# Altium PCB lps_display_rev_10.PcbDoc (part 1 of 3)
Units mil, origin at the board's own origin, x right, y up, seen from the top; angles counter-clockwise.
Board outline 5360 x 2470 mil, 2 copper layers (Top Layer, Bottom Layer), stack 6.2 mil thick; 137 components, 84 nets, 474 pads, 135 vias.
Unrouted connection lines stored in the file: 10.
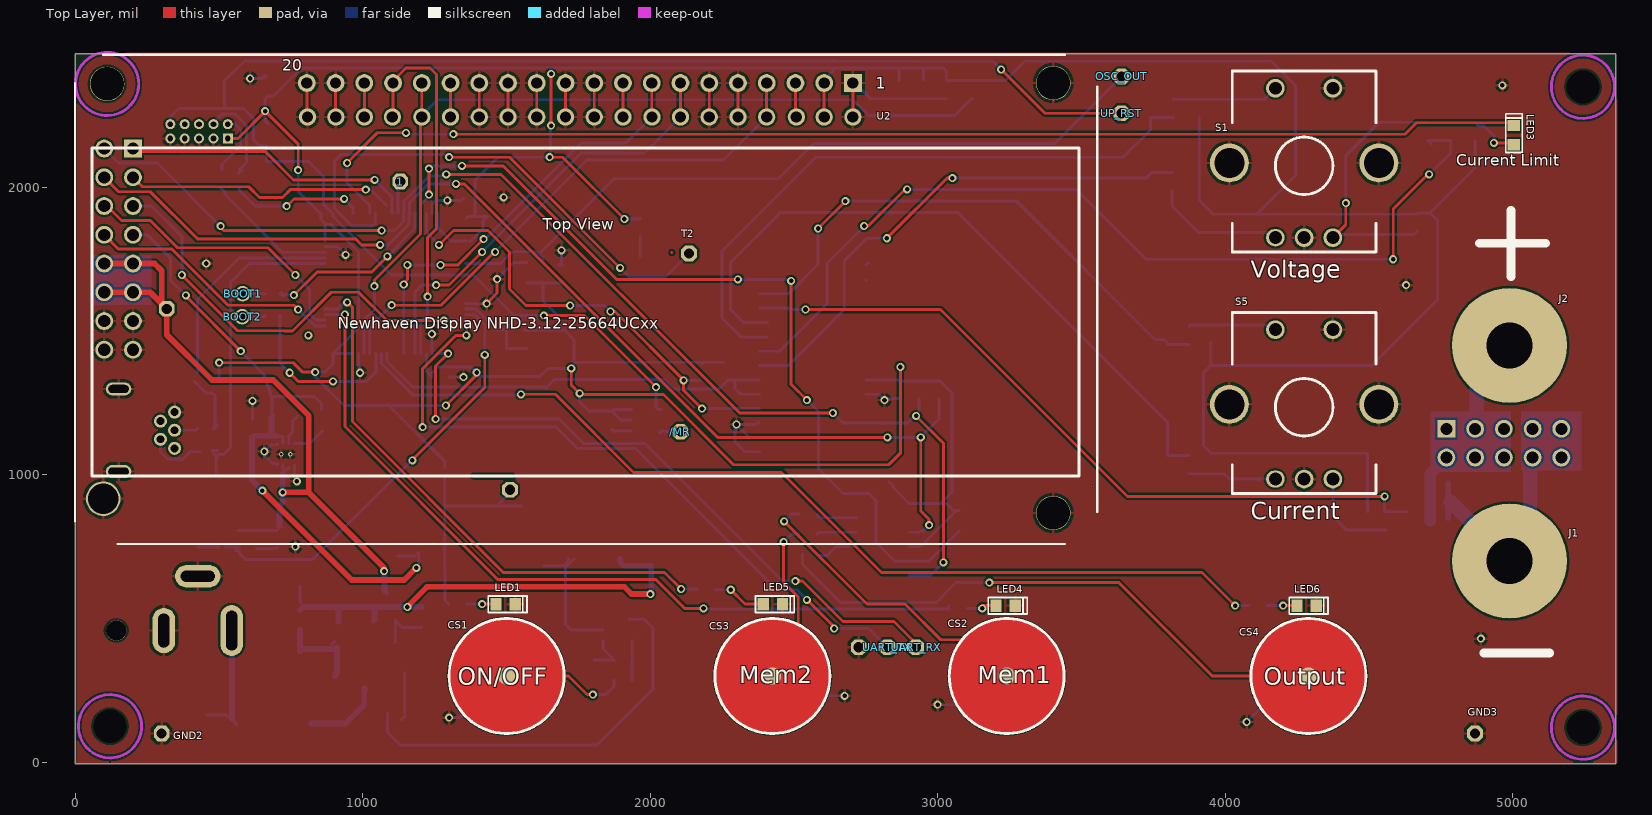
[diagram p0: Top Layer view]
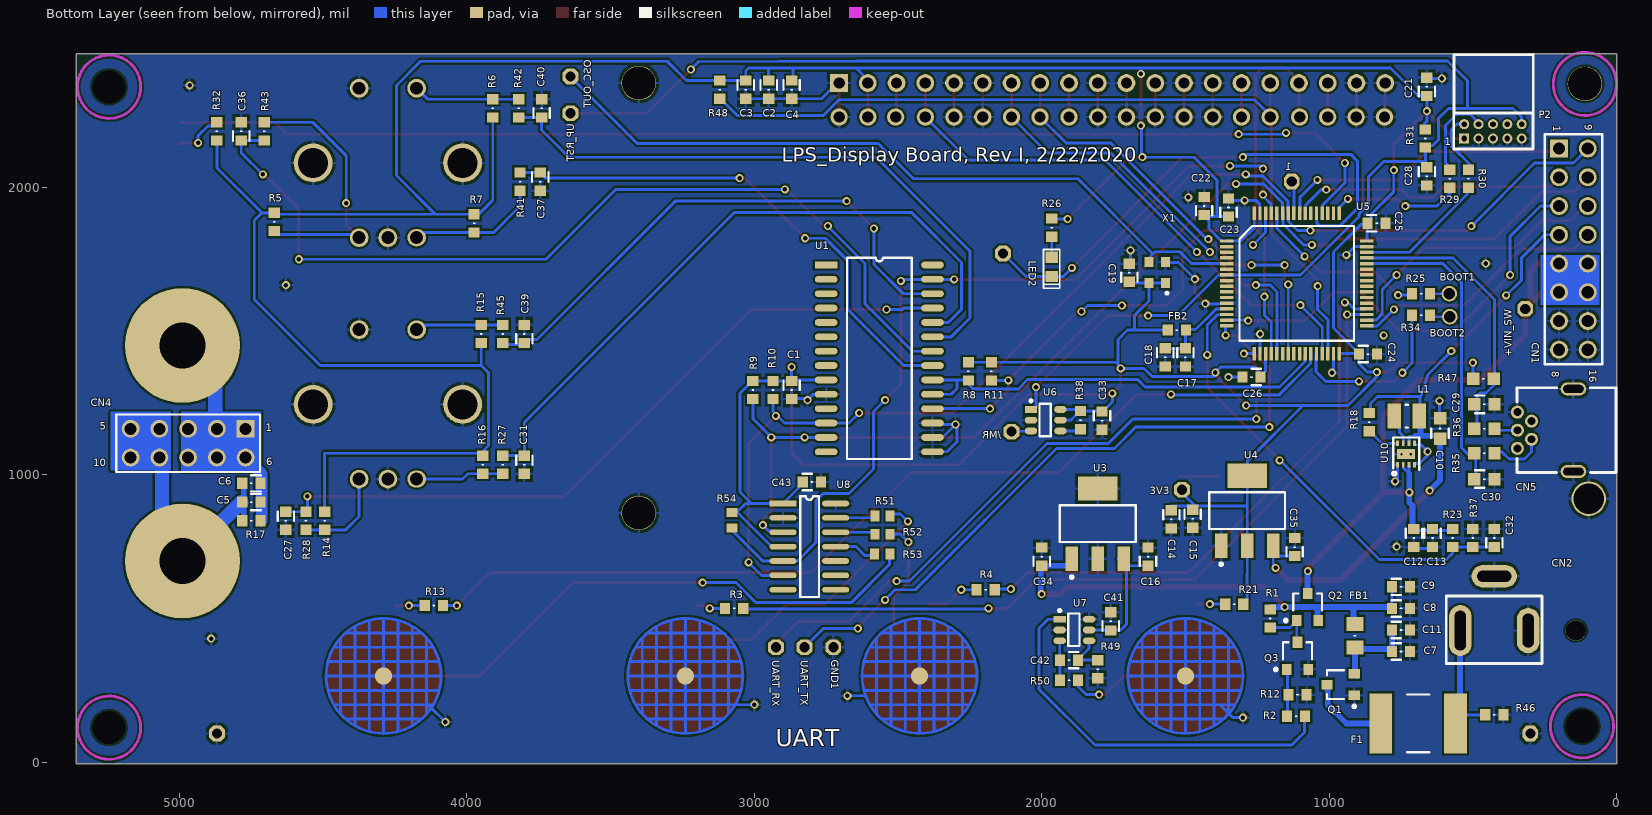
[diagram p1: Bottom Layer view, seen from below]
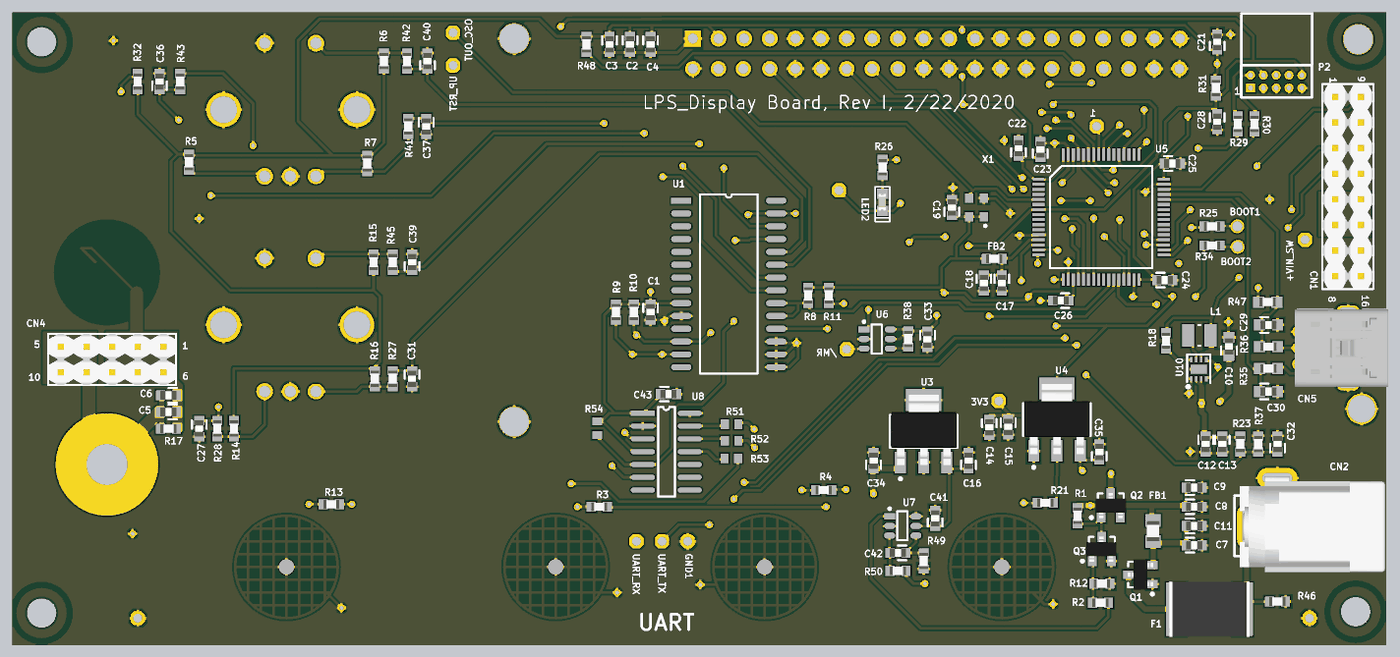
[diagram p3: 3D render of the assembled board from below, using the file's embedded part models]

## Layer stack, top to bottom
Top Solder: solder mask 0.4, Solder Resist, Dk 3.5
Top Layer: signal copper 0.6
Dielectric 2: prepreg 5, Dk 4.2
Bottom Layer: signal copper 0.6
Bottom Solder: solder mask 0.4, Solder Resist, Dk 3.5

## Board outline
0,-5 5360,-5 5360,2465 0,2465

## Design rules (kind name [scope] priority, off if disabled: settings)
Clearance [All] p1: gap=7 ignorepadtopadclearanceinfootprint=FALSE except(0: Arc-Hole Track-Hole SMDPad-Hole THPad-Hole Via-Hole Fill-Hole Poly-Hole Region-Hole Text-Hole)
ComponentClearance [All] p1 off: gap=10 collisioncheckmode=3 verticalgap=10 showdistances=FALSE
HoleSize [All] p1: absolutevalues=TRUE maxlimit=200 minlimit=1 maxpercent=80.000 minpercent=20.000
MinimumSolderMaskSliver [All] p1: minsoldermaskwidth=5
PolygonConnect [All] p1: connectstyle=Relief reliefconductorwidth=10 reliefentries=4 polygonreliefangle="90 Angle" airgapwidth=10
RoutingVias [All] p1: holewidth=28 width=50 viastyle="Through Hole" minholewidth=28 minwidth=50 maxholewidth=28 maxwidth=50
SilkToSolderMaskClearance [IsPad] p1: minsilkscreentomaskgap=1 clearancetoexposedcopper=TRUE
SolderMaskExpansion [All] p1: expansion=4
Width [All] p1: maxlimit=200 minlimit=7 preferedwidth=10 minimp=50.000000 maximp=50.000000 favimp=50.000000
26 further rules are at their usual default settings.

## Classes and differential pairs
component class lps_display_rev_10_p2: 1 /MR BOOT1 BOOT2 C17 C18 C19 C21 C22 C23 C24 C25 C26 C28 C29 C30 C33 C43 CN5 CS2 CS3 CS4 FB2 LED2 LED3 LED4 LED5 LED6 OSC_OUT P2 R3 R4 R13 R25 R26 R29 R30 R31 R32 R34 R35 R36 R38 R47 R51 R52 R53 R54 T2 U5 U6 U8 UART_RX UART_TX UP_RST X1
component class lps_display_rev_10_p1: 3V3 +VIN_SW C1 C2 C3 C4 C5 C6 C7 C8 C9 C10 C11 C12 C13 C14 C15 C16 C27 C31 C32 C34 C35 C36 C37 C39 C40 C41 C42 CN1 CN2 CN4 CN? CS1 F1 FB1 GND1 GND2 GND3 J1 J2 L1 LED1 LED? Q1 Q2 Q3 R1 R2 R5 R6 R7 R8 R9 R10 R11 R12 R14 R15 R16 R17 R18 R21 R23 R27 R28 R37 R41 R42 R43 R45 R46 R48 R49 R50 R? S1 S5 U1 U2 U3 U4 U7 U10 U?

## Components (designator, comment, footprint, x,y, rotation, side; value= is the part's Value field where it differs from the comment)
1 "" "TestPoint-TH 35 mil"#1 1130,2020 r90 top
3V3 "" "TestPoint-TH 35 mil"#2 1467,963 r90 bottom
+VIN_SW "" "TestPoint-TH 35 mil"#3 267.5,1577.5 r180 bottom
/MR "" "TestPoint-TH 35 mil"#1 2105,1150 r90 top
BOOT1 "TP" "TestPoint-TH 40 mil" 581.5,1630 r90 top
BOOT2 "TP" "TestPoint-TH 40 mil" 580,1550 r90 top
C1 "0.1uF 0603 50V" CAPC0603(1608)_N 2870,1295 r270 bottom
C2 "10uF" CAPC0603(1608)_N 2950,2340 r270 bottom
C3 "10uF" CAPC0603(1608)_N 3030,2340 r270 bottom
C4 "0.1uF 0603 50V" CAPC0603(1608)_N 2870,2340 r270 bottom
C5 "10uF" CAPC0603(1608)_N 4750,905 r0 bottom
C6 "0.1uF 0603 50V" CAPC0603(1608)_N 4750,970 r0 bottom
C7 "10uF" CAPC0603(1608)_N 750,385 r180 bottom
C8 "0.1uF 0603 50V" CAPC0603(1608)_N 750,535 r180 bottom
C9 "10uF" CAPC0603(1608)_N 750,610 r180 bottom
C10 "22uF" CAPC0603(1608)_M 614,1161 r90 bottom
C11 "0.1uF 0603 50V" CAPC0603(1608)_N 750,460 r180 bottom
C12 "10uF" CAPC0603(1608)_N 705,780 r270 bottom
C13 "0.1uF 0603 50V" CAPC0603(1608)_N 640,780 r270 bottom
C14 "10uF" CAPC0603(1608)_N 1549,845 r270 bottom
C15 "0.1uF 0603 50V" CAPC0603(1608)_N 1475,847 r270 bottom
C16 "10uF" CAPC0603(1608)_N 1630,715 r90 bottom
C17 "10uF" CAPC0603(1608)_N 1500,1408.5 r270 bottom
C18 "0.1uF 0603 50V" CAPC0603(1608)_N 1570,1408.5 r270 bottom
C19 "0.1uF 0603 50V" CAPC0603(1608)_N 1695,1703 r90 bottom
C21 "0.1uF 0603 50V" CAPC0603(1608)_N 660,2350 r90 bottom
C22 "10uF" CAPC0603(1608)_N 1435,1935 r90 bottom
C23 "0.1uF 0603 50V" CAPC0603(1608)_N 1350,1930 r90 bottom
C24 "0.1uF 0603 50V" CAPC0603(1608)_N 865,1420 r180 bottom
C25 "0.1uF 0603 50V" CAPC0603(1608)_N 835,1875 r180 bottom
C26 "0.1uF 0603 50V" CAPC0603(1608)_N 1270,1340 r0 bottom
C27 "0.1uF 0603 50V" CAPC0603(1608)_N 4630,840 r270 bottom
C28 "1uF" CAPC0603(1608)_N 660,2038.5 r270 bottom
C29 "33pF" CAPC0603(1608)_M 460,1245 r180 bottom
C30 "33pF" CAPC0603(1608)_M 460,985 r180 bottom
C31 "0.1uF 0603 50V" CAPC0603(1608)_N 3800,1035 r270 bottom
C32 "0.1uF 0603 50V" CAPC0603(1608)_N 425,780 r90 bottom
C33 "0.1uF 0603 50V" CAPC0603(1608)_N 1790,1188.5 r270 bottom
C34 "0.1uF 0603 50V" CAPC0603(1608)_N 2000,715 r90 bottom
C35 "0.1uF 0603 50V" CAPC0603(1608)_N 1120,748.5 r90 bottom
C36 "0.1uF 0603 50V" CAPC0603(1608)_N 4785,2195 r90 bottom
C37 "0.1uF 0603 50V" CAPC0603(1608)_N 3745,2020 r270 bottom
C39 "0.1uF 0603 50V" CAPC0603(1608)_N 3800,1490 r90 bottom
C40 "0.1uF 0603 50V" CAPC0603(1608)_N 3740,2275 r90 bottom
C41 "0.1uF 0603 50V" CAPC0603(1608)_N 1760,490 r90 bottom
C42 "0.1uF 0603 50V" CAPC0603(1608)_N 1905,355 r0 bottom
C43 "0.1uF 0603 50V" CAPC0603(1608)_N 2800,975 r180 bottom
CN1 "Header 8X2A" HDR2X8_CEN 200,2135 r270 bottom
CN2 "PJ-050AH" PJ-050AH 543.57,458 r270 bottom
CN4 "Header 5X2A" HDR2X5_CEN 4770,1160 r0 bottom locked
CN5 "Mini-USB RA Type B" "USB-MINI-B - 2A" 150,1155 r180 bottom
CS1 "Cap_Sense_Pad" CAP_TOUCH_ROUND#1 1500,300 r0 top locked
CS2 "Cap_Sense_Pad" CAP_TOUCH_ROUND#2 3240,300 r0 top locked
CS3 "Cap_Sense_Pad" CAP_TOUCH_ROUND#3 2425,300 r0 top locked
CS4 "Cap_Sense_Pad" CAP_TOUCH_ROUND#4 4290,300 r0 top locked
F1 "2920L500/16MR" "2920 Fuse" 690,135 r0 bottom
FB1 "300 Ohm @ 100MHz, 0806" RESC0805(2012)_M 910,440 r90 bottom
FB2 "BLM18RK601SN1D" RESC0603(1608)_N 1530,1503.5 r180 bottom
GND1 "" "TestPoint-TH 35 mil"#4 2520,195 r90 bottom
GND2 "" "TestPoint-TH 35 mil"#5 290,55 r90 top
GND3 "" "TestPoint-TH 35 mil"#6 4870,105 r90 top
J1 "banana_jack1" Banana_jack1#1 4495,645 r0 top
J2 "banana_jack1" Banana_jack1#2 5690,1720 r0 top
L1 "2.2uH" INDC2520X10N 730,1204 r180 bottom
LED1 "G" SM-LED-0603 1463.07,550 r180 top
LED2 "G" SM-LED-0603 1965,1756.93 r90 bottom
LED3 "G" SM-LED-0603 5005,2148.07 r270 top
LED4 "G" SM-LED-0603 3203.07,545 r180 top
LED5 "G" SM-LED-0603 2393.07,550 r180 top
LED6 "G" SM-LED-0603 4250,545 r180 top
OSC_OUT "" "TestPoint-TH 35 mil"#7 3607,2386 r90 top
P2 "jtag_debug" jtag_debug 530,2170 r270 bottom
Q1 "DMP3099L-7" SOT23 960,270 r90 bottom
Q2 "DMP3099L-7" SOT23 1075,540 r180 bottom
Q3 "MMBT3904" SOT23 1110,370 r180 bottom
R1 "4.7K" RESC0603(1608)_N 1205,500 r90 bottom
R2 "4.7K" RESC0603(1608)_N 1115,160 r180 bottom
R3 "1.0K" RESC0603(1608)_N 3070,535 r0 bottom
R4 "1.0K" RESC0603(1608)_N 2195,600 r0 bottom
R5 "4.7K" RESC0603(1608)_N 4670,1880 r90 bottom
R6 "4.7K" RESC0603(1608)_N 3910,2275 r270 bottom
R7 "4.7K" RESC0603(1608)_N 3975,1875 r90 bottom
R8 "4.7K" RESC0603(1608)_N 2255,1360 r90 bottom
R9 "4.7K" RESC0603(1608)_N 3005,1295 r90 bottom
R10 "4.7K" RESC0603(1608)_N 2935,1295 r90 bottom
R11 "4.7K" RESC0603(1608)_N 2175,1360 r90 bottom
R12 "4.7K" RESC0603(1608)_N 1110,235 r180 bottom
R13 "1.0K" RESC0603(1608)_N 4115,545 r0 bottom
R14 "4.7K" RESC0603(1608)_N 4495,840 r90 bottom
R15 "4.7K" RESC0603(1608)_N 3950,1490 r270 bottom
R16 "4.7K" RESC0603(1608)_N 3945,1035 r90 bottom
R17 "4.7K" RESC0603(1608)_N 4750,840 r180 bottom
R18 "100K" RESC0603(1608)_N 860,1183 r270 bottom
R21 "4.7K" RESC0603(1608)_N 1330,550 r180 bottom
R23 "1.0K" RESC0603(1608)_N 570,780 r90 bottom
R25 "100K" RESC0603(1608)_N 680,1630 r0 bottom
R26 "1.0K" RESC0603(1608)_N 1965,1860 r90 bottom
R27 "4.7K" RESC0603(1608)_N 3875,1035 r90 bottom
R28 "4.7K" RESC0603(1608)_N 4560,840 r90 bottom
R29 "100" RESC0603(1608)_N 580,2030 r270 bottom
R30 "100" RESC0603(1608)_N 515,2030 r270 bottom
R31 "10K 1%" RESC0603(1608)_N 665,2170 r270 bottom
R32 "1.0K" RESC0603(1608)_N 4870,2195 r270 bottom
R34 "100K" RESC0603(1608)_N 680,1555 r180 bottom
R35 "22" RESC0603(1608)_M 460,1075 r0 bottom
R36 "22" RESC0603(1608)_M 460,1160 r0 bottom
R37 "1.0K" RESC0603(1608)_N 500,780 r270 bottom
R38 "4.7K" RESC0603(1608)_N 1865,1190 r90 bottom
R41 "4.7K" RESC0603(1608)_N 3815,2020 r90 bottom
R42 "4.7K" RESC0603(1608)_N 3820,2275 r90 bottom
R43 "4.7K" RESC0603(1608)_N 4705,2195 r270 bottom
R45 "4.7K" RESC0603(1608)_N 3875,1490 r90 bottom
R46 "1.0K" RESC0603(1608)_N 425,165 r0 bottom
R47 "1.54K" RESC0603(1608)_M 463,1334 r180 bottom
R48 "4.7K" RESC0603(1608)_N 3120,2340 r90 bottom
R49 "1.0K" RESC0603(1608)_N 1805,323.5 r90 bottom
R50 "1.0K" RESC0603(1608)_N 1905,285 r0 bottom
R51 "5.1K" RESC1608X55X30NL15T15 2554,857 r180 bottom
R52 "5.1K" RESC1608X55X30NL15T15 2554,793 r180 bottom
R53 "5.1K" RESC1608X55X30NL15T15 2555,724 r180 bottom
R54 "5.1K" RESC1608X55X30NL15T15 3078,842 r90 bottom
S1 "rotary encoder" "rotary encoder" 4175,1825 r0 top locked
S5 "rotary encoder" "rotary encoder" 4175,985 r0 top locked
T2 "" "TestPoint-TH 35 mil"#1 2135,1770 r0 top
U1 "MCP23017" SOIC28 2750.08,1730 r180 bottom locked
U2 "OLED Display" oled_graphic_256X64 2705,2363.1 r0 top locked
U3 "TPS7B6933QDCYRQ1" SOT-223 1805,830 r180 bottom locked
U4 "3.3V" DSO-G3 1285,875 r180 bottom locked
U5 "STM32F103RCT6" LQFP64 1356.73,1813.54 r180 bottom locked
U6 "TPS3808G33" SOt-23-6 2037.36,1227.4 r180 bottom
U7 "AT42QT1012" SOt-23-6 1937.36,497.4 r180 bottom
U8 "AT42QT1070" SOP14 2900,900 r180 bottom
U10 "TPS62173DSGT" "WSON(8) 2mm x 2mm" 741.84,1034.6 r180 bottom
UART_RX "" "TestPoint-TH 35 mil"#8 2820,125 r90 top
UART_TX "" "TestPoint-TH 35 mil"#9 2705,195 r90 top
UP_RST "" "TestPoint-TH 35 mil"#10 3610,2258 r90 top
X1 "8.0000MHZ" ECS-TXO-2520-33-160-AN-TR-Footprint-1 1570,1667.52 r90 bottom

## Footprints (in the part's own frame and the unit in brackets; to place one, negate y for a bottom-side part, rotate by r counter-clockwise, add the part's x,y. Pads: shape width x height; smd on the part's side, far side on the other; paste and mask are expansions set on the pad)
"2920 Fuse" [mm] "2620 Fuse, 2-Leads, Body 7.36x5.12mm, IPC Medium Density"
  rect 2x5.3 smd: 1(-3.3,0) 2(3.3,0)
  silkscreen extent -1,-2.55 1,2.55, body extent -3.99,-2.72 3.99,2.72, height 2
Banana_jack1#1 [mil]
  round 400 hole 160: 1(495,55)
Banana_jack1#2 [mil]
  round 400 hole 160: 1(-700,-270)
CAP_TOUCH_ROUND#1 [mil] "CAP_TOUCH_ROUND"
  round 60 smd: 1(0,0)
  round 60 smd far side: 2(0,0)
  Top Layer lines w200: 80.36,59.52 cw(c0,0) 100,0 cw(c0,0) 80.36,59.52
  Bottom Layer lines w10: -190,-50 -150,-50 ; -190,50 -150,50 ; -170,-100 -155,-100 -150,-100 ; -170,100 -150,100 ; -150,-130 -150,-100 ; -150,130 -150,100 ; -130,-150 -100,-150 ; -130,150 -100,150 ; -100,-170 -100,-150 ; -100,170 -100,150 ; -50,-190 -50,-150 ; -50,190 -50,150 ; 50,-190 50,-150 ; 50,190 50,150 ; 100,-170 100,-150 ; 100,170 100,150 ; 130,-150 100,-150 ; 130,150 100,150 ; 150,-130 150,-100 ; 150,130 150,100 ; 170,-100 150,-100 ; 170,100 150,100 ; 190,-50 172.2,-50 150,-50 ; 190,50 150,50 ; -200,0 cw(c0,0) 0,200 ; -200,0 ccw(c0,0) -173.21,-100 ccw(c0,0) -166.22,-111.22 ccw(c0,0) 0,-200 ; -200,0 -150,0 ; -150,-100 -150,-50 ; -150,-100 -100,-100 ; -150,-50 -150,0 ; -150,-50 -100,-50 ; -150,0 -150,50 ; -150,0 -100,0 ; -150,50 -150,100 ; -150,50 -100,50 ; -150,100 -100,100 ; -100,-150 -100,-100 ; -100,-150 -50,-150 ; -100,-100 -100,-50 ; -100,-100 -50,-100 ; -100,-50 -100,0 ; -100,-50 -50,-50 ; -100,0 -100,50 ; -100,0 -50,0 ; -100,50 -100,100 ; -100,50 -50,50 ; -100,100 -100,150 ; -100,100 -50,100 ; -100,150 -50,150 ; -50,-150 -50,-100 ; -50,-150 0,-150 ; -50,-100 -50,-50 ; -50,-100 0,-100 ; -50,-50 -50,0 ; -50,-50 0,-50 ; -50,0 -50,50 ; -50,0 0,0 ; -50,50 -50,100 ; -50,50 0,50 ; -50,100 -50,150 ; -50,100 0,100 ; -50,150 0,150 ; 0,-200 ccw(c0,0) 198.6,-23.6 ccw(c0,0) 200,0 ; 0,-200 0,-150 ; 0,-150 0,-100 ; 0,-150 50,-150 ; 0,-100 0,-50 ; 0,-100 50,-100 ; 0,-50 0,0 ; 0,-50 50,-50 ; 0,0 0,50 ; 0,0 50,0 ; 0,50 0,100 ; 0,50 50,50 ; 0,100 0,150 ; 0,100 50,100 ; 0,150 0,200 ; 0,150 50,150 ; 0,200 cw(c0,0) 200,0 ; 50,-150 50,-100 ; 50,-150 100,-150 ; 50,-100 50,-50 ; 50,-100 100,-100 ; 50,-50 50,0 ; 50,-50 100,-50 ; 50,0 50,50 ; 50,0 100,0 ; 50,50 50,100 ; 50,50 100,50 ; 50,100 50,150 ; 50,100 100,100 ; 50,150 100,150 ; 100,-150 100,-100 ; 100,-100 122.2,-100 150,-100 ; 100,-100 100,-50 ; 100,-50 100,0 ; 100,-50 150,-50 ; 100,0 100,50 ; 100,0 150,0 ; 100,50 100,100 ; 100,50 150,50 ; 100,100 100,150 ; 100,100 150,100 ; 150,-100 150,-72.2 150,-50 ; 150,-50 150,0 ; 150,0 175,0 200,0 ; 150,0 150,50 ; 150,50 150,100
CAP_TOUCH_ROUND#2 [mil] "CAP_TOUCH_ROUND"
  round 60 smd: 1(0,0)
  round 60 smd far side: 2(0,0)
  Top Layer lines w200: -80.64,59.14 cw(c0,0) 100,0 cw(c0,0) -80.64,59.14
  Bottom Layer lines w10: -190,-50 -150,-50 ; -190,50 -150,50 ; -170,-100 -150,-100 ; -170,100 -150,100 ; -150,-130 -150,-100 ; -150,130 -150,100 ; -130,-150 -100,-150 ; -130,150 -100,150 ; -100,-170 -100,-150 ; -100,170 -100,150 ; -50,-190 -50,-150 ; -50,190 -50,150 ; 50,-190 50,-150 ; 50,190 50,150 ; 100,-170 100,-150 ; 100,170 100,150 ; 130,-150 100,-150 ; 130,150 100,150 ; 150,-130 150,-100 ; 150,130 150,100 ; 170,-100 150,-100 ; 170,100 150,100 ; 190,-50 150,-50 ; 190,50 150,50 ; -200,0 cw(c0,0) 0,200 ; -200,0 ccw(c0,0) -173.21,-100 ccw(c0,0) 0,-200 ; -200,0 -150,0 ; -150,-100 -100,-100 ; -150,-100 -150,-50 ; -150,-50 -100,-50 ; -150,-50 -150,0 ; -150,0 -100,0 ; -150,0 -150,50 ; -150,50 -100,50 ; -150,50 -150,100 ; -150,100 -100,100 ; -100,-150 -100,-100 ; -100,-150 -50,-150 ; -100,-100 -50,-100 ; -100,-100 -100,-50 ; -100,-50 -50,-50 ; -100,-50 -100,0 ; -100,0 -50,0 ; -100,0 -100,50 ; -100,50 -50,50 ; -100,50 -100,100 ; -100,100 -50,100 ; -100,100 -100,150 ; -100,150 -50,150 ; -50,-150 -50,-100 ; -50,-150 0,-150 ; -50,-100 0,-100 ; -50,-100 -50,-50 ; -50,-50 0,-50 ; -50,-50 -50,0 ; -50,0 0,0 ; -50,0 -50,50 ; -50,50 0,50 ; -50,50 -50,100 ; -50,100 0,100 ; -50,100 -50,150 ; -50,150 0,150 ; 0,-200 ccw(c0,0) 200,0 ; 0,-200 0,-150 ; 0,-150 0,-100 ; 0,-150 50,-150 ; 0,-100 50,-100 ; 0,-100 0,-50 ; 0,-50 50,-50 ; 0,-50 0,0 ; 0,0 50,0 ; 0,0 0,50 ; 0,50 50,50 ; 0,50 0,100 ; 0,100 50,100 ; 0,100 0,150 ; 0,150 0,200 ; 0,150 50,150 ; 0,200 cw(c0,0) 200,0 ; 50,-150 50,-100 ; 50,-150 100,-150 ; 50,-100 100,-100 ; 50,-100 50,-50 ; 50,-50 100,-50 ; 50,-50 50,0 ; 50,0 100,0 ; 50,0 50,50 ; 50,50 100,50 ; 50,50 50,100 ; 50,100 100,100 ; 50,100 50,150 ; 50,150 100,150 ; 100,-150 100,-100 ; 100,-100 150,-100 ; 100,-100 100,-50 ; 100,-50 150,-50 ; 100,-50 100,0 ; 100,0 150,0 ; 100,0 100,50 ; 100,50 150,50 ; 100,50 100,100 ; 100,100 150,100 ; 100,100 100,150 ; 150,-100 150,-50 ; 150,-50 150,0 ; 150,0 200,0 ; 150,0 150,50 ; 150,50 150,100
CAP_TOUCH_ROUND#3 [mil] "CAP_TOUCH_ROUND"
  round 60 smd: 1(0,0)
  round 60 smd far side: 2(0,0)
  Top Layer circle w200: c0,0 r100
  Bottom Layer lines w10: -190,-50 -150,-50 ; -190,50 -150,50 ; -170,-100 -150,-100 ; -170,100 -150,100 ; -150,-130 -150,-100 ; -150,130 -150,100 ; -130,-150 -100,-150 ; -130,150 -100,150 ; -100,-170 -100,-150 ; -100,170 -100,150 ; -50,-190 -50,-150 ; -50,190 -50,150 ; 50,-190 50,-150 ; 50,190 50,150 ; 100,-170 100,-150 ; 100,170 100,150 ; 130,-150 100,-150 ; 130,150 100,150 ; 150,-130 150,-100 ; 150,130 150,100 ; 170,-100 150,-100 ; 170,100 150,100 ; 190,-50 150,-50 ; 190,50 150,50 ; -200,0 cw(c0,0) 0,200 ; -200,0 ccw(c0,0) 0,-200 ; -200,0 -150,0 ; -150,-100 -150,-50 ; -150,-100 -100,-100 ; -150,-50 -100,-50 ; -150,-50 -150,0 ; -150,0 -100,0 ; -150,0 -150,50 ; -150,50 -100,50 ; -150,50 -150,100 ; -150,100 -100,100 ; -100,-150 -100,-100 ; -100,-150 -50,-150 ; -100,-100 -100,-50 ; -100,-100 -50,-100 ; -100,-50 -100,0 ; -100,-50 -50,-50 ; -100,0 -100,50 ; -100,0 -50,0 ; -100,50 -100,100 ; -100,50 -50,50 ; -100,100 -100,150 ; -100,100 -50,100 ; -100,150 -50,150 ; -50,-150 -50,-100 ; -50,-150 0,-150 ; -50,-100 -50,-50 ; -50,-100 0,-100 ; -50,-50 -50,0 ; -50,-50 0,-50 ; -50,0 -50,50 ; -50,0 0,0 ; -50,50 -50,100 ; -50,50 0,50 ; -50,100 -50,150 ; -50,100 0,100 ; -50,150 0,150 ; 0,-200 ccw(c0,0) 185.68,-74.32 ccw(c0,0) 200,0 ; 0,-200 0,-150 ; 0,-150 0,-100 ; 0,-150 50,-150 ; 0,-100 0,-50 ; 0,-100 50,-100 ; 0,-50 0,0 ; 0,-50 50,-50 ; 0,0 0,50 ; 0,0 50,0 ; 0,50 0,100 ; 0,50 50,50 ; 0,100 0,150 ; 0,100 50,100 ; 0,150 0,200 ; 0,150 50,150 ; 0,200 cw(c0,0) 200,0 ; 50,-150 50,-100 ; 50,-150 100,-150 ; 50,-100 50,-50 ; 50,-100 100,-100 ; 50,-50 50,0 ; 50,-50 100,-50 ; 50,0 50,50 ; 50,0 100,0 ; 50,50 50,100 ; 50,50 100,50 ; 50,100 50,150 ; 50,100 100,100 ; 50,150 100,150 ; 100,-150 100,-100 ; 100,-100 100,-50 ; 100,-100 150,-100 ; 100,-50 100,0 ; 100,-50 150,-50 ; 100,0 100,50 ; 100,0 150,0 ; 100,50 100,100 ; 100,50 150,50 ; 100,100 100,150 ; 100,100 150,100 ; 150,-100 150,-50 ; 150,-50 150,0 ; 150,0 200,0 ; 150,0 150,50 ; 150,50 150,100
CAP_TOUCH_ROUND#4 [mil] "CAP_TOUCH_ROUND"
  round 60 smd: 1(0,0)
  round 60 smd far side: 2(0,0)
  Top Layer lines w200: -100,0 cw(c0,0) 100,0 cw(c0,0) -100,0
  Bottom Layer lines w10: -190,-50 -150,-50 ; -190,50 -150,50 ; -170,-100 -155,-100 -150,-100 ; -170,100 -150,100 ; -150,-130 -150,-100 ; -150,130 -150,100 ; -130,-150 -100,-150 ; -130,150 -100,150 ; -100,-170 -100,-150 ; -100,170 -100,150 ; -50,-190 -50,-150 ; -50,190 -50,150 ; 50,-190 50,-150 ; 50,190 50,150 ; 100,-170 100,-150 ; 100,170 100,150 ; 130,-150 100,-150 ; 130,150 100,150 ; 150,-130 150,-100 ; 150,130 150,100 ; 170,-100 150,-100 ; 170,100 150,100 ; 190,-50 150,-50 ; 190,50 150,50 ; -200,0 ccw(c0,0) -166.22,-111.22 ccw(c0,0) 0,-200 ; -200,0 cw(c0,0) 0,200 ; -200,0 -150,0 ; -150,-100 -150,-50 ; -150,-100 -100,-100 ; -150,-50 -100,-50 ; -150,-50 -150,0 ; -150,0 -100,0 ; -150,0 -150,50 ; -150,50 -150,100 ; -150,50 -100,50 ; -150,100 -100,100 ; -100,-150 -100,-100 ; -100,-150 -50,-150 ; -100,-100 -100,-50 ; -100,-100 -50,-100 ; -100,-50 -50,-50 ; -100,-50 -100,0 ; -100,0 -50,0 ; -100,0 -100,50 ; -100,50 -100,100 ; -100,50 -50,50 ; -100,100 -100,150 ; -100,100 -50,100 ; -100,150 -50,150 ; -50,-150 0,-150 ; -50,-150 -50,-100 ; -50,-100 0,-100 ; -50,-100 -50,-50 ; -50,-50 0,-50 ; -50,-50 -50,0 ; -50,0 0,0 ; -50,0 -50,50 ; -50,50 0,50 ; -50,50 -50,100 ; -50,100 0,100 ; -50,100 -50,150 ; -50,150 0,150 ; 0,-200 ccw(c0,0) 198.6,-23.6 ccw(c0,0) 200,0 ; 0,-200 0,-150 ; 0,-150 50,-150 ; 0,-150 0,-100 ; 0,-100 50,-100 ; 0,-100 0,-50 ; 0,-50 50,-50 ; 0,-50 0,0 ; 0,0 0,50 ; 0,0 45,0 50,0 ; 0,50 50,50 ; 0,50 0,100 ; 0,100 50,100 ; 0,100 0,150 ; 0,150 50,150 ; 0,150 0,200 ; 0,200 cw(c0,0) 200,0 ; 50,-150 100,-150 ; 50,-150 50,-100 ; 50,-100 100,-100 ; 50,-100 50,-50 ; 50,-50 100,-50 ; 50,-50 50,0 ; 50,0 100,0 ; 50,0 50,50 ; 50,50 100,50 ; 50,50 50,100 ; 50,100 100,100 ; 50,100 50,150 ; 50,150 100,150 ; 100,-150 100,-100 ; 100,-100 150,-100 ; 100,-100 100,-50 ; 100,-50 150,-50 ; 100,-50 100,0 ; 100,0 150,0 ; 100,0 100,50 ; 100,50 150,50 ; 100,50 100,100 ; 100,100 150,100 ; 100,100 100,150 ; 150,-100 150,-50 ; 150,-50 150,0 ; 150,0 150,50 ; 150,0 175,0 200,0 ; 150,50 150,100
CAPC0603(1608)_M [mm] "Chip Capacitor, Body 1.6x0.8mm, Height 1.0mm, IPC Low Density"
  rect 1.1x1.1 smd: 1(-0.9,0) 2(0.9,0)
  silkscreen extent -0.82,-0.78 0.05,0.78, body extent -0.8,-0.44 0.8,0.42, height 0.86
CAPC0603(1608)_N [mm] "Chip Capacitor, Body 1.6x0.8mm, Height 1.0mm, IPC Medium Density"
  rect 0.9x1 smd: 1(-0.8,0) 2(0.8,0)
  silkscreen extent -0.82,-0.73 0.05,0.73, body extent -0.8,-0.44 0.8,0.42, height 0.86
DSO-G3 [mm] "SOT-223/SC-73; 4 Leads; Body 6.7 x 7.3 mm, inc. leads (LxW max)"
  rect 1.1x2.15 smd: 1(-2.3,-3.1) 2(0,-3.1) 3(2.3,-3.1)
  rect 3.5x2.15 smd: 4(0,3.1)
  silkscreen extent -3.35,-4.85 3.35,1.63, body extent -3.25,-3.4 3.25,3.56, height 1.68
ECS-TXO-2520-33-160-AN-TR-Footprint-1 [mm]
  rect 0.9x0.8 smd: 1(0,0) 2(1.85,0) 3(1.85,1.45) 4(0,1.45)
  silkscreen extent -1,-0.23 -0.82,-0.05, body extent -0.29,-0.28 2.12,1.71, height 1
HDR2X5_CEN [mil] "Connector; Header; 5x2 Position"
  rect 62x62 hole 42: 1(0,0)
  round 62 hole 42: 2(100,0) 3(200,0) 4(300,0) 5(400,0) 6(0,100) 7(100,100) 8(200,100) 9(300,100) 10(400,100)
  silkscreen extent -50,-50 450,150, body extent -50,-50 450,150, height 330
HDR2X8_CEN [mil] "Connector; Header; 8x2 Position"
  rect 62x62 hole 42: 1(0,0)
  round 62 hole 42: 2(100,0) 3(200,0) 4(300,0) 5(400,0) 6(500,0) 7(600,0) 8(700,0) 9(0,100) 10(100,100) 11(200,100) 12(300,100) 13(400,100) 14(500,100) 15(600,100) 16(700,100)
  silkscreen extent -50,-50 750,150, body extent -50,-50 750,150, height 330
INDC2520X10N [mm] "Chip Inductor, 2-Leads, Body 2.50x2.00mm, IPC Medium Density"
  rect 1.21x2.22 smd: 1(-1.1,0) 2(1.1,0)
  silkscreen extent -0.1,-1.01 0.1,1.01, body extent -1.35,-1.1 1.35,1.1, height 1
jtag_debug [mil] "jtag_debug"
  rect 35x35 hole 20: 1(0,0)
  round 35 hole 20: 2(-50,0) 3(0,50) 4(-50,50) 5(0,100) 6(-50,100) 7(0,150) 8(-50,150) 9(0,200) 10(-50,200)
  silkscreen extent -292,-36 37,240
LQFP64 [mm] "LQPF64"
  oval 1.2x0.3 smd: 1(0,0)
  rect 1.2x0.3 smd: 2(0,-0.5) 3(0,-1) 4(0,-1.5) 5(0,-2) 6(0,-2.5) 7(0,-3) 8(0,-3.5) 9(0,-4) 10(0,-4.5) 11(0,-5) 12(0,-5.5) 13(0,-6) 14(0,-6.5) 15(0,-7) 16(0,-7.5) 33(12.4,-7.5) 34(12.4,-7) 35(12.4,-6.5) 36(12.4,-6) 37(12.4,-5.5) 38(12.4,-5) 39(12.4,-4.5) 40(12.4,-4) 41(12.4,-3.5) 42(12.4,-3) 43(12.4,-2.5) 44(12.4,-2) 45(12.4,-1.5) 46(12.4,-1) 47(12.4,-0.5) 48(12.4,0)
  rect 0.3x1.2 smd: 17(2.45,-9.95) 18(2.95,-9.95) 19(3.45,-9.95) 20(3.95,-9.95) 21(4.45,-9.95) 22(4.95,-9.95) 23(5.45,-9.95) 24(5.95,-9.95) 25(6.45,-9.95) 26(6.95,-9.95) 27(7.45,-9.95) 28(7.95,-9.95) 29(8.45,-9.95) 30(8.95,-9.95) 31(9.45,-9.95) 32(9.95,-9.95) 49(9.95,2.45) 50(9.45,2.45) 51(8.95,2.45) 52(8.45,2.45) 53(7.95,2.45) 54(7.45,2.45) 55(6.95,2.45) 56(6.45,2.45) 57(5.95,2.45) 58(5.45,2.45) 59(4.95,2.45) 60(4.45,2.45) 61(3.95,2.45) 62(3.45,2.45) 63(2.95,2.45) 64(2.45,2.45)
  silkscreen extent 1.13,-8.81 11.26,1.32
oled_graphic_256X64 [mil]
  round 120 hole 116: 0(-2595,-3) 1(697,-1496.06) 1(697,0)
  round 120 hole 106.3: 1(-2608.27,-1446.22)
  round 60 hole 39.37: 1(0,-118.11) 2(-100,-118.11) 3(-196.85,-118.11) 4(-300,-118.11) 5(-400,-118.11) 6(-500,-118.11) 7(-600,-118.11) 8(-699.21,-118.11) 9(-800,-118.11) 10(-900,-118.11) 11(-1000,-118.11) 12(-1100,-118.11) 13(-1200,-118.11) 14(-1300,-118.11) 15(-1400,-118.11) 16(-1500,-118.11) 17(-1602.36,-118.11) 18(-1700,-118.11) 19(-1799.21,-118.11) 20(-1897.64,-118.11)
  rect 62x62 hole 39.37: 1(0,0)
  round 62 hole 39.37: 2(-100,0) 3(-200,0) 4(-300,0) 5(-400,0) 6(-500,0) 7(-600,0) 8(-700,0) 9(-800,0) 10(-900,0) 11(-1000,0) 12(-1100,0) 13(-1200,0) 14(-1300,0) 15(-1400,0) 16(-1500,0) 17(-1600,0) 18(-1700,0) 19(-1800,0) 20(-1900,0)
  Top Layer lines w10: -1900,-107.87 -1900,0 ; -1800,-107.09 -1800,0 ; -1700,-114.96 -1700,0 ; -1600,-104.72 -1600,-88.11 -1600,0 ; -1500,-118.11 -1500,-108.11 -1500,0 ; -1400,-118.11 -1400,0 ; -1300,-109.45 -1300,0 ; -1200,-109.45 -1200,0 ; -1100,-104.72 -1100,0 ; -1000,-118.11 -1000,0 ; -900,-118.11 -900,0 ; -800,-118.11 -800,0 ; -700,-101.57 -700,0 ; -600,-118.11 -600,0 ; -500,-106.3 -500,0 ; -400,-118.11 -400,0 ; -300,-118.11 -300,0 ; -200,-114.96 -200,0 ; -100,-118.11 -100,0 ; 0,-118.11 0,0 ; -630.32,-589.76 -630.31,-589.76
  silkscreen extent -2707,-1604 850,98
PJ-050AH [mm] "Power Connector, 2.0mm ID, 5.5mm OD"
  round 1.8 hole 1.8 unplated: 0(0,10.2)
  oval 4.5x2 hole 1 slot 3.5 at 0 deg: 1(0,0)
  oval 4x2 hole 1 slot 3 at 0 deg: 2(0,6)
  oval 2x4 hole 1 slot 3 at 90 deg: 3(-4.8,3)
  silkscreen extent -3.05,-1.24 2.92,7.21, body extent -4.98,-0.72 4.52,13.68, height 11
RESC0603(1608)_M [mm] "Chip Resistor, Body 1.6x0.8mm, IPC Low Density"
  rect 1.1x1.1 smd: 1(-0.9,0) 2(0.9,0)
  silkscreen extent -0.05,-0.05 0.05,0.05, body extent -0.8,-0.43 0.8,0.43, height 0.51
RESC0603(1608)_N [mm] "Chip Resistor, Body 1.6x0.8mm, IPC Medium Density"
  rect 0.9x1 smd: 1(-0.8,0) 2(0.8,0)
  silkscreen extent -0.05,-0.05 0.05,0.05, body extent -0.8,-0.43 0.8,0.43, height 0.51
RESC0805(2012)_M [mm] "Chip Resistor, Body 2.0x1.3mm, IPC Low Density"
  rect 1.25x1.5 smd: 1(-1.05,0) 2(1.05,0)
  silkscreen extent -0.05,-0.05 0.05,0.05, body extent -1.01,-0.63 0.99,0.63, height 0.46
RESC1608X55X30NL15T15 [mm] "Chip Resistor, 2-Leads, Body 1.60x0.80mm, IPC Medium Density"
  rect 0.8x0.95 smd: 1(-0.675,0) 2(0.675,0)
  body extent -0.87,-0.48 0.87,0.48, height 0.55
"rotary encoder" [mil] "rotary encoder"
  oval 65x60 hole 45: 1(0,0)
  round 65 hole 45: 2(100,0) 3(200,0) 5(200,520) 6(0,520)
  round 135 hole 105: 4(360,260) 7(-160,260)
  silkscreen extent -150,-50 350,580
SM-LED-0603 [mm] "0603 LED"
  rect 1x1.1 smd: 1(0,0) 2(-1.7,0)
  silkscreen extent -2.75,-0.71 0.69,0.74, body extent -1.65,-0.34 0,0.39, height 0.67
SOIC28 [mm]
  rect 2x0.6 smd: 1(0,0)
  oval 2x0.6 smd: 2(0,-1.27) 3(0,-2.54) 4(0,-3.81) 5(0,-5.08) 6(0,-6.35) 7(0,-7.62) 8(0,-8.89) 9(0,-10.16) 10(0,-11.43) 11(0,-12.7) 12(0,-13.97) 13(0,-15.24) 14(0,-16.51) 15(9.4,-16.51) 16(9.4,-15.24) 17(9.4,-13.97) 18(9.4,-12.7) 19(9.4,-11.43) 20(9.4,-10.16) 21(9.4,-8.89) 22(9.4,-7.62) 23(9.4,-6.35) 24(9.4,-5.08) 25(9.4,-3.81) 26(9.4,-2.54) 27(9.4,-1.27) 28(9.4,0)
  silkscreen extent 1.84,-17.14 7.56,0.63
SOP14 [mm]
  rect 2.388x0.5 smd: 1(0,0)
  oval 2.388x0.5 smd: 2(0,-1.27) 3(0,-2.54) 4(0,-3.81) 5(0,-5.08) 6(0,-6.35) 7(0,-7.62) 8(4.648,-7.62) 9(4.648,-6.35) 10(4.648,-5.08) 11(4.648,-3.81) 12(4.648,-2.54) 13(4.648,-1.27) 14(4.648,0)
  silkscreen extent 1.52,-8.25 3.17,0.63
SOT23 [mm] "SOT-23; 3 Leads; Body 3.0 x 2.5 mm, inc. leads (LxW max)"
  rect 0.85x1 smd: 1(-0.95,-1.2) 2(0.95,-1.2) 3(0,1.2)
  silkscreen extent -2.05,-1.32 1.28,1.2, body extent -1.5,-1.27 1.5,1.23, height 1.1
SOt-23-6 [mm]
  rect 1.1x0.6 smd: 1(0,0)
  oval 1.1x0.6 smd: 2(0,-0.95) 3(0,-1.9) 4(2.6,-1.9) 5(2.6,-0.95) 6(2.6,0)
  silkscreen extent -0.1,-2.38 1.75,0.86
SOT-223 [mm] "SOT-223/SC-73; 4 Leads; Body 6.7 x 7.3 mm, inc. leads (LxW max)"
  rect 1.1x2.15 smd: 1(-2.3,-3.1) 2(0,-3.1) 3(2.3,-3.1)
  rect 3.5x2.15 smd: 4(0,3.1)
  silkscreen extent -3.35,-4.85 3.35,1.63, body extent -3.22,-3.35 3.28,3.61, height 1.68
"TestPoint-TH 35 mil"#1 [mil] "Test Point - Thru-Hole 38 mil"
  oct 55x55 hole 35: 1(0,0)
"TestPoint-TH 35 mil"#2 [mil] "Test Point - Thru-Hole 38 mil"
  oct 55x55 hole 35: 1(-15,45)
"TestPoint-TH 35 mil"#3 [mil] "Test Point - Thru-Hole 38 mil"
  oct 55x55 hole 35: 1(-50,0)
"TestPoint-TH 35 mil"#4 [mil] "Test Point - Thru-Hole 38 mil"
  oct 55x55 hole 35: 1(205,205)
"TestPoint-TH 35 mil"#5 [mil] "Test Point - Thru-Hole 38 mil"
  oct 55x55 hole 35: 1(45,-10)
"TestPoint-TH 35 mil"#6 [mil] "Test Point - Thru-Hole 38 mil"
  oct 55x55 hole 35: 1(-5,0)
"TestPoint-TH 35 mil"#7 [mil] "Test Point - Thru-Hole 38 mil"
  oct 55x55 hole 35: 1(0,-33)
"TestPoint-TH 35 mil"#8 [mil] "Test Point - Thru-Hole 38 mil"
  oct 55x55 hole 35: 1(275,-105)
"TestPoint-TH 35 mil"#9 [mil] "Test Point - Thru-Hole 38 mil"
  oct 55x55 hole 35: 1(205,-120)
"TestPoint-TH 35 mil"#10 [mil] "Test Point - Thru-Hole 38 mil"
  oct 55x55 hole 35: 1(0,-30)
"TestPoint-TH 40 mil" [mil] "Test Point - Thru-Hole 40"
  round 54 hole 40: 1(0,0)
"USB-MINI-B - 2A" [mm] "Mini RA USB-B Connector 2A"
  oval 2.25x1.15 hole 0.7 slot 1.8 at 0 deg: 0(0,-3.65) 0(0,3.65)
  round 1.15 hole 0.7: 1(-4.95,-1.6) 2(-3.7,-0.8) 3(-4.95,0) 4(-3.7,0.8) 5(-4.95,1.6)
  silkscreen extent -5,-3.75 3.75,3.75, body extent -5.25,-3.85 3.95,3.85, height 3.95
"WSON(8) 2mm x 2mm" [mm]
  rect 0.25x0.5 smd: 1(-0.5,0) 2(0,0) 3(0.5,0) 4(1,0) 5(1,1.9) 6(0.5,1.9) 7(0,1.9) 8(-0.5,1.9)
  rect 1.6x0.9 smd: 9(0.25,0.95)
  silkscreen extent -0.95,-0.92 1.4,2.42, body extent -0.78,-0.1 1.27,2, height 0.8

## Part data
1 3V3 +VIN_SW /MR GND1 GND2 GND3 OSC_OUT T2 UART_RX UART_TX UP_RST: library part TestPoint, "Test Point"
BOOT1 BOOT2: library part TestPoint-PC-W, "Test Point White", Color=White, Manufacturer="Keystone Electronics", Manufacturer Part Number=5002, Supplier Part Number 1=36-5002-ND, Category="Test and Measurement", ComponentLink1Description=http://www.keyelco.com/product-pdf.cfm?p=1311, ComponentLink1URL=http://www.keyelco.com/product-pdf.cfm?p=1311, Height=-, Material - Body="Phosphor Bronze", Material - Insulation="Nylon 46, UL 94V-0", Mounting Type="0.040\" (1.02mm) Hole Diameter", Packaging=Bulk, Part Status=Active, Plating=Silver, Pricing 1="1=0.37, 10=0.316, 50=0.2298, 100=0.2209, 250=0.19832, 1000=0.1616, 2500=0.14424, 5000=0.13523 (USD)", RoHS="RoHS Compliant", Size / Dimension="0.100\" Dia x 0.180\" L (2.54mm x 4.57mm)", Stock 1=329102, Supplier 1=Digi-Key, Type="PC Test Point, Miniature"
C1 C4 C6: library part "CAP CER 0.1UF 50V 10% X7R 0603", Capacitance=0.1µF, Manufacturer=Kemet, Manufacturer Part Number=C0603C104K5RACTU, Operating Temperature="-55°C ~ 125°C", Package / Case="0603 (1608 Metric)", Ratings=-, Supplier Part Number 1=399-5089-1-ND, Temperature Coefficient=X7R, Tolerance=±10%, Voltage - Rated=50V, Applications="General Purpose", Category=Capacitors, ClassName=AD1, ComponentLink1Description=http://www.kemet.com/docfinder?Partnumber=C0603C104K5RACTU, ComponentLink1URL=http://www.kemet.com/docfinder?Partnumber=C0603C104K5RACTU, Features=-, Height - Seated (Max)=-, Lead Spacing=-, Lead Style=-, Mounting Type="Surface Mount, MLCC", Packaging="Cut Tape (CT)", Pricing 1="1=0.1, 10=0.041, 50=0.0222, 100=0.0187, 250=0.01532, 500=0.0131, 1000=0.0102 (USD)", RoHS="RoHS Compliant", Size / Dimension="0.063\" L x 0.031\" W (1.60mm x 0.80mm)", Stock 1=1397942, Supplier 1=Digi-Key, Thickness (Max)="0.034\" (0.87mm)"
C2 C3 C5 C14 C16 C17 C22: library part "CAP CER 10UF 16V 20% X5R 0603", "10UF 0603 16V", Capacitance=10µF, Manufacturer="Murata Electronics North America", Manufacturer Part Number=GRM188R61C106MA73D, Operating Temperature="-55°C ~ 85°C", Package / Case=0603, Ratings=-, Supplier Part Number 1=490-7201-1-ND, Temperature Coefficient=X5R, Tolerance=±20%, Voltage - Rated=16V, Applications="General Purpose", Category=Capacitors, ComponentLink1Description=http://www.murata.com/~/media/webrenewal/support/library/catalog/products/capacitor/mlcc/c02e.ashx, ComponentLink1URL=http://www.murata.com/~/media/webrenewal/support/library/catalog/products/capacitor/mlcc/c02e.ashx, Features=-, Height - Seated (Max)=-, Lead Spacing=-, Lead Style=-, Mounting Type="Surface Mount, MLCC", Packaging="Cut Tape (CT)", Pricing 1="1=0.18, 10=0.167, 25=0.1428, 50=0.1214, 100=0.1167, 250=0.1048, 500=0.10002, 1000=0.08335 (USD)", RoHS="RoHS Compliant", Size / Dimension="0.063\" L x 0.031\" W (1.60mm x 0.80mm)", Stock 1=99081, Supplier 1=Digi-Key, Thickness (Max)="0.031\" (0.80mm)"
C7 C9 C12: library part "CAP CER 10UF 16V 20% X5R 0603", "10UF 0603 16V", Capacitance=10µF, Manufacturer="Murata Electronics North America", Manufacturer Part Number=GRM188R61C106MA73D, Operating Temperature="-55°C ~ 85°C", Package / Case=0603, Ratings=-, Supplier Part Number 1=490-7201-1-ND, Temperature Coefficient=X5R, Tolerance=±20%, Voltage - Rated=25V, Applications="General Purpose", Category=Capacitors, ComponentLink1Description=http://www.murata.com/~/media/webrenewal/support/library/catalog/products/capacitor/mlcc/c02e.ashx, ComponentLink1URL=http://www.murata.com/~/media/webrenewal/support/library/catalog/products/capacitor/mlcc/c02e.ashx, Features=-, Height - Seated (Max)=-, Lead Spacing=-, Lead Style=-, Mounting Type="Surface Mount, MLCC", Packaging="Cut Tape (CT)", Pricing 1="1=0.18, 10=0.167, 25=0.1428, 50=0.1214, 100=0.1167, 250=0.1048, 500=0.10002, 1000=0.08335 (USD)", RoHS="RoHS Compliant", Size / Dimension="0.063\" L x 0.031\" W (1.60mm x 0.80mm)", Stock 1=99081, Supplier 1=Digi-Key, Thickness (Max)="0.031\" (0.80mm)"
C8 C11 C13 C15 C18 C19 C21 C23 C24 C25 C26 C27 C31 C33 C34 C35 C36 C37 C39 C40 C41 C43: library part "CAP CER 0.1UF 50V 10% X7R 0603", Capacitance=0.1µF, Manufacturer=Yageo, Manufacturer Part Number=CC0603ZRY5V9BB104, Operating Temperature="-30°C ~ 85°C", Package / Case=0603, Ratings=-, Supplier Part Number 1=311-1343-1-ND, Temperature Coefficient="Y5V (F)", Tolerance="-20%, +80%", Voltage - Rated=50V, Applications="General Purpose", Category=Capacitors, ComponentLink1Description=http://www.yageo.com/documents/recent/UPY-GPHC_Y5V_6.3V-to-50V_8.pdf, ComponentLink1URL=http://www.yageo.com/documents/recent/UPY-GPHC_Y5V_6.3V-to-50V_8.pdf, Failure Rate=-, Features=-, Height - Seated (Max)=-, Lead Spacing=-, Lead Style=-, Mounting Type="Surface Mount, MLCC", Packaging="Cut Tape (CT)", Part Status=Active, Pricing 1="1=0.1, 10=0.019, 100=0.0087, 500=0.0062, 1000=0.00487 (USD)", RoHS="RoHS Compliant", Size / Dimension="0.063\" L x 0.031\" W (1.60mm x 0.80mm)", Stock 1=2192156, Supplier 1=Digi-Key, Thickness (Max)="0.035\" (0.90mm)"
C10: library part CMP-001-0737-02, "CAP CER 22UF 10V 20% 0603", Case/Package=0603, Case Code (Metric)=1608, Dielectric=X5R, Max Operating Temperature=85°C, Min Operating Temperature=-55°C, Package Quantity=4000, Tolerance=20%, Voltage Rating=10V, Capacitance=22uF, Case Code (Imperial)=0603, Depth=0.8mm, Height=0.8mm, Lead Free="Lead Free", Length=1.6mm, Material=Ceramic, Mount="Surface Mount", Packaging="Tape and Reel", REACH SVHC="No SVHC", Termination=SMD/SMT, Thickness=0.039inch, Voltage Rating (DC)=10V, Weight=0.000222oz, Width=0.8mm
C28: library part "CAP CER 1UF 10V 10% X5R 0603", "1uF 0603 10V", Capacitance=1.0µF, Manufacturer=Kemet, Manufacturer Part Number=C0603C105K8PACTU, Operating Temperature="-55°C ~ 85°C", Package / Case=0603, Ratings=-, Supplier Part Number 1=399-3118-1-ND, Temperature Coefficient=X5R, Tolerance=±10%, Voltage - Rated=10V, Applications="General Purpose", Category=Capacitors, ComponentLink1Description=http://www.kemet.com/datasheets&C0603C105K8PACTU, ComponentLink1URL=http://www.kemet.com/datasheets&C0603C105K8PACTU, Features=-, Height - Seated (Max)=-, Lead Spacing=-, Lead Style=-, Mounting Type="Surface Mount, MLCC", Packaging="Cut Tape (CT)", Pricing 1="1=0.1, 10=0.043, 25=0.0304, 50=0.0232, 100=0.0196, 250=0.01608, 1000=0.0105 (USD)", RoHS="RoHS Compliant", Size / Dimension="0.063\" L x 0.031\" W (1.60mm x 0.80mm)", Stock 1=1121198, Supplier 1=Digi-Key, Thickness (Max)="0.035\" (0.90mm)"
C29 C30: library part CMP-007-0143-08, "CAP CER 33PF 50V 5% NP0 0603", Dielectric Material=Ceramic, Package (Imperial)=0603, Package (Metric)=1608, Temperature Coefficient="C0G, NP0", Tolerance=5%, Voltage (Rated)=50V, Capacitance=33pF, Mounting Type=SMD
C32: library part "CAP CER 0.1UF 50V 10% X7R 0603", Capacitance=10µF, Manufacturer=Kemet, Manufacturer Part Number=C0603C104K5RACTU, Operating Temperature="-55°C ~ 125°C", Package / Case="0603 (1608 Metric)", Ratings=-, Supplier Part Number 1=399-5089-1-ND, Temperature Coefficient=X7R, Tolerance=±10%, Voltage - Rated=50V, Applications="General Purpose", Category=Capacitors, ClassName=AD1, ComponentLink1Description=http://www.kemet.com/docfinder?Partnumber=C0603C104K5RACTU, ComponentLink1URL=http://www.kemet.com/docfinder?Partnumber=C0603C104K5RACTU, Features=-, Height - Seated (Max)=-, Lead Spacing=-, Lead Style=-, Mounting Type="Surface Mount, MLCC", Packaging="Cut Tape (CT)", Pricing 1="1=0.1, 10=0.041, 50=0.0222, 100=0.0187, 250=0.01532, 500=0.0131, 1000=0.0102 (USD)", RoHS="RoHS Compliant", Size / Dimension="0.063\" L x 0.031\" W (1.60mm x 0.80mm)", Stock 1=1397942, Supplier 1=Digi-Key, Thickness (Max)="0.034\" (0.87mm)"
C42: library part "CAP CER 0.1UF 50V 10% X7R 0603", Capacitance=6.8nF, Manufacturer=Yageo, Manufacturer Part Number=CC0603ZRY5V9BB104, Operating Temperature="-30°C ~ 85°C", Package / Case=0603, Ratings=-, Supplier Part Number 1=311-1343-1-ND, Temperature Coefficient="Y5V (F)", Tolerance="-20%, +80%", Voltage - Rated=50V, Applications="General Purpose", Category=Capacitors, ComponentLink1Description=http://www.yageo.com/documents/recent/UPY-GPHC_Y5V_6.3V-to-50V_8.pdf, ComponentLink1URL=http://www.yageo.com/documents/recent/UPY-GPHC_Y5V_6.3V-to-50V_8.pdf, Failure Rate=-, Features=-, Height - Seated (Max)=-, Lead Spacing=-, Lead Style=-, Mounting Type="Surface Mount, MLCC", Packaging="Cut Tape (CT)", Part Status=Active, Pricing 1="1=0.1, 10=0.019, 100=0.0087, 500=0.0062, 1000=0.00487 (USD)", RoHS="RoHS Compliant", Size / Dimension="0.063\" L x 0.031\" W (1.60mm x 0.80mm)", Stock 1=2192156, Supplier 1=Digi-Key, Thickness (Max)="0.035\" (0.90mm)"
CN1: library part CMP-001-0325-01, "Header, 8-Pin, Dual row", Component Name="Header 8X2A", LatestRevisionDate=17-Jul-2002, LatestRevisionNote="Re-released for DXP Platform.", Pin Count=16, Publisher="Altium Limited"
CN2: library part CMP-001-0507-01, "Power Barrel Connector Jack 2.00mm ID 5.50mm OD Through Hole, Right Angle", Color=Black, Current Rating=5A, Manufacturer=CUI, Operating Temperature="-25°C ~ 85°C", Voltage - Rated=24VDC, ComponentLink1Description=http://www.mouser.com/ds/2/670/PJ-050AH-524150.pdf, ComponentLink1URL=http://www.mouser.com/ds/2/670/PJ-050AH-524150.pdf, Component Name=PJ-050AH, Connector Type=Jack, Contact Material=Copper, Contact Material - Plating=Nickel, Family="Barrel - Power Connectors", Features=-, Gender=Male, Housing Color=Black, Housing Material=Thermoplastic, Internal Switch(s)="Single Switch, Normally Closed", Manufacturer Part Number=PJ-050AH, Mounting Type="Through Hole, Right Angle", Number of Positions/Contacts="2 Conductors, 3 Contacts", Pin Count=3, Plug/Mating Plug Diameter="2.1mm ID, 5.5mm OD", Pricing 1="1=0.78, 10=0.689, 25=0.648, 50=0.621, 100=0.594, 250=0.54, 500=0.486, 1000=0.432, 2500=0.3915 (USD)", Series=-, Shielding=Unshielded, Stock 1=4408, Termination=Solder
CN4: library part CMP-001-0310-01, "Header, 5-Pin, Dual row", Component Name="Header 5X2A", LatestRevisionDate=17-Jul-2002, LatestRevisionNote="Re-released for DXP Platform.", Pin Count=10, Publisher="Altium Limited"
CN5: library part CMP-001-0449-01, "Mini-USB RA Type B 2A", Current Rating=2A, Insulation Color=Black, Manufacturer="Tensility International Corp", Manufacturer Part Number=54-00019, Material Flammability Rating=-, Operating Temperature="-10°C ~ 60°C", Voltage - Rated=30VDC, ComponentLink1Description=http://www.tensility.com/pdffiles/54-00019.pdf, ComponentLink1URL=http://www.tensility.com/pdffiles/54-00019.pdf, Component Name="Mini-USB RA Type B 2A 54-00019", Connector Type="USB - mini B", Contact Finish=Gold, Features="Board Guide", Gender=Receptacle, Ingress Protection=-, Mating Cycles=5000, Mounting Feature=Horizontal, Mounting Type="Through Hole, Right Angle", Number of Contacts=5, Number of Ports=1, Packaging=Tube, Part Status=Active, Pin Count=6, Pricing 1="50=0.6202 (USD)", RoHS="RoHS Compliant", Shell/Shielding Material="Phosphor Bronze", Shielding=Unshielded, Specifications=-, Stock 1=0, Supplier Link 2=https://www.arrow.com/en/products/54-00019/tensility-international, Termination=Solder
F1: library part CMP-001-0852-01, "PTC RESET FUSE 16V 5A 2920", Case/Package=2920, Case Code (Metric)=7351, Hold Current=5A, Max Current Rating=40A, Max Operating Temperature=85°C, Max Power Dissipation=2W, Min Operating Temperature=-40°C, Package Quantity=1, Trip Current=10A, Voltage Rating (DC)=16V, Case Code (Imperial)=2920, Height=1.6mm, Lead Free="Lead Free", Length=7.98mm, Packaging="Tape and Reel", REACH SVHC="No SVHC", Termination=SMD/SMT, Time to Trip=5s, Width=5.44mm
FB1: library part "FERRITE 40 OHM 1.5A 0805", "40 OHM 0805 1.5A", Current Rating=1.5A, DC Resistance (DCR)="50 mOhm Max", Impedance @ Frequency="40 Ohm @ 100MHz", Manufacturer="Laird-Signal Integrity Products", Manufacturer Part Number=MI0805K400R-10, Package / Case="0805 (2012 Metric)", Supplier Part Number 1=240-2389-1-ND, Category=Filters, ComponentLink1Description=http://staging.lairdtech.com/WorkArea/linkit.aspx?LinkIdentifier=id&ItemID=4949, ComponentLink1URL=http://staging.lairdtech.com/WorkArea/linkit.aspx?LinkIdentifier=id&ItemID=4949, Creator=osman, Filter Type="Differential Mode - Single", Height (Max)="0.043\" (1.10mm)", Mounting Type="Surface Mount", Packaging="Cut Tape (CT)", Pricing 1="1=0.1, 10=0.077, 25=0.07, 50=0.0628, 100=0.0461, 250=0.03352, 500=0.03074, 1000=0.02654 (USD)", RoHS="RoHS Compliant", Size / Dimension="0.079\" L x 0.049\" W (2.00mm x 1.25mm)", Stock 1=112318, Supplier 1=Digi-Key
FB2: library part "FERRITE BEAD 120 OHM 0603 1LN", "FERRITE 120 OHM 0603 500mA", Current Rating (Max)=500mA, DC Resistance (DCR) (Max)="180 mOhm", Impedance @ Frequency="120 Ohm @ 100MHz", Manufacturer="TDK Corporation", Manufacturer Part Number=MMZ1608R121ATA00, Operating Temperature="-55°C ~ 125°C", Package / Case="0603 (1608 Metric)", Ratings=-, Supplier Part Number 1=445-2170-1-ND, Category=Filters, ComponentLink1Description=https://product.tdk.com/info/en/catalog/datasheets/beads_commercial_signal_mmz1608_en.pdf, ComponentLink1URL=https://product.tdk.com/info/en/catalog/datasheets/beads_commercial_signal_mmz1608_en.pdf, Filter Type="Signal Line", Height (Max)="0.037\" (0.95mm)", Mounting Type="Surface Mount", Number of Lines=1, Packaging="Cut Tape (CT)", Part Status=Active, Pricing 1="1=0.1, 10=0.073, 100=0.0436, 250=0.03168, 500=0.02904, 1000=0.02508 (USD)", RoHS="RoHS Compliant", Size / Dimension="0.063\" L x 0.031\" W (1.60mm x 0.80mm)", Stock 1=21122, Supplier 1=Digi-Key
L1: library part CMP-001-0772-02, "FIXED IND 2.2UH 1.9A 117 MOHM", Case/Package=1008, Case Code (Metric)=2520, Current Rating=1.9A, DC Resistance (DCR)=117mR, Inductance=2.2uh, Inductance Tolerance=20%, Max Operating Temperature=105°C, Min Operating Temperature=-40°C, Package Quantity=3000, Saturation Current=2A, Test Frequency=2MHz, Case Code (Imperial)=1008, Composition=Wirewound, Core Material="Ferrite, Metal", Halogen Free="Halogen Free", Height=1.2mm, Height - Seated (Max)=0.047inch, Length=2.5mm, Max DC Current=1.9A, Mount="Surface Mount", Packaging="Tape and Reel", Radiation Hardening=No, REACH SVHC=Unknown, RMS Current (Irms)=1.9A, Shielding=Shielded, Termination=SMD/SMT, Tolerance=20%, Width=0.079inch
LED1 LED2 LED3 LED4 LED5 LED6: library part "0603 LED", "0603 SMD LED", PN=P11500CT-ND, Vendor=Digikey
Q1 Q2: "DMP3099L-7 MOSFET P-CH SOT23", Current - Continuous Drain (Id) @ 25°C="3.8A (Ta)", Drive Voltage (Max Rds On,  Min Rds On)="4.5V, 10V", Manufacturer="Diodes Incorporated", Operating Temperature="-55°C ~ 150°C (TJ)", Package / Case="TO-236-3, SC-59, SOT-23-3", Power Dissipation (Max)="1.08W (Ta)", Supplier Device Package=SOT-23, Supplier Part Number 1=DMP3099L-7DICT-ND, Category="Discrete Semiconductor Products", ComponentLink1Description=https://www.diodes.com/assets/Datasheets/DMP3099L.pdf, ComponentLink1URL=https://www.diodes.com/assets/Datasheets/DMP3099L.pdf, FET Feature=-, FET Type=P-Channel, Manufacturer Part Number=DMP3099L-7, Mounting Type="Surface Mount", Packaging="Cut Tape (CT)", Part Status=Active, Pricing 1="1=0.42, 10=0.306, 100=0.1801, 500=0.10198, 1000=0.07818 (USD)", Rds On (Max) @ Id, Vgs="65 mOhm @ 3.8A, 10V", RoHS="RoHS Compliant", Stock 1=138833, Supplier 1=Digi-Key, Technology="MOSFET (Metal Oxide)", Text="30V, 3A", Vgs (Max)=±20V, Vgs(th) (Max) @ Id="2.1V @ 250µA"
Q3: "MMBT3904 NPN", Current - Collector (Ic) (Max)=200mA, Current - Collector Cutoff (Max)=-, DC Current Gain (hFE) (Min) @ Ic, Vce="100 @ 10mA, 1V", Frequency - Transition=300MHz, Manufacturer="ON Semiconductor", Manufacturer Part Number=MMBT3904WT1G, Package / Case="SC-70, SOT-323", Power - Max=150mW, Supplier Device Package="SC-70-3 (SOT323)", Supplier Part Number 1=MMBT3904WT1GOSCT-ND, Voltage - Collector Emitter Breakdown (Max)=40V, Category="Discrete Semiconductor Products", ComponentLink1Description=http://www.onsemi.com/pub_link/Collateral/MMBT3904WT1-D.PDF, ComponentLink1URL=http://www.onsemi.com/pub_link/Collateral/MMBT3904WT1-D.PDF, Mounting Type="Surface Mount", MPN=MMBT3904WT1G, Packaging="Cut Tape (CT)", PN=MMBT3904WT1GOSCT-ND, Pricing 1="1=0.17, 10=0.154, 25=0.1404, 100=0.101, 250=0.05952, 500=0.04938, 1000=0.03368 (USD)", RoHS="RoHS Compliant", Stock 1=3, Supplier 1=Digi-Key, Transistor Type=NPN, Vce Saturation (Max) @ Ib, Ic="300mV @ 5mA, 50mA", Vendor=Digikey
R1 R8 R9 R10 R11 R48: library part "RES 4.7K OHM 1/10W 5% 0603 SMD", "4.7K 0603", Manufacturer="Panasonic Electronic Components", Manufacturer Part Number=ERJ-3GEYJ472V, Package / Case=0603, Power (Watts)="0.1W, 1/10W", Resistance (Ohms)=5.1k, Supplier Part Number 1=P4.7KGCT-ND, Temperature Coefficient=±200ppm/°C, Tolerance=±5%, Category=Resistors, ComponentLink1Description=http://industrial.panasonic.com/www-cgi/jvcr13pz.cgi?E+PZ+3+AOA0001+ERJ3GEYJ472V+7+WW, ComponentLink1URL=http://industrial.panasonic.com/www-cgi/jvcr13pz.cgi?E+PZ+3+AOA0001+ERJ3GEYJ472V+7+WW, Composition="Thick Film", Features="Automotive AEC-Q200 Qualified", Height="0.022\" (0.55mm)", Number of Terminations=2, Packaging="Cut Tape (CT)", Pricing 1="1=0.1, 50=0.0126, 100=0.0096, 250=0.00716, 500=0.00528, 1000=0.00352, 2500=0.00297 (USD)", RoHS="RoHS Compliant", Size / Dimension="0.063\" L x 0.031\" W (1.60mm x 0.80mm)", Stock 1=1261582, Supplier 1=Digi-Key, Supplier Device Package=0603
R2 R5 R6 R7 R15 R41 R42 R43 R45: library part "RES 4.7K OHM 1/10W 5% 0603 SMD", "4.7K 0603", Manufacturer="Panasonic Electronic Components", Manufacturer Part Number=ERJ-3GEYJ472V, Package / Case=0603, Power (Watts)="0.1W, 1/10W", Resistance (Ohms)=10k, Supplier Part Number 1=P4.7KGCT-ND, Temperature Coefficient=±200ppm/°C, Tolerance=±5%, Category=Resistors, ComponentLink1Description=http://industrial.panasonic.com/www-cgi/jvcr13pz.cgi?E+PZ+3+AOA0001+ERJ3GEYJ472V+7+WW, ComponentLink1URL=http://industrial.panasonic.com/www-cgi/jvcr13pz.cgi?E+PZ+3+AOA0001+ERJ3GEYJ472V+7+WW, Composition="Thick Film", Features="Automotive AEC-Q200 Qualified", Height="0.022\" (0.55mm)", Number of Terminations=2, Packaging="Cut Tape (CT)", Pricing 1="1=0.1, 50=0.0126, 100=0.0096, 250=0.00716, 500=0.00528, 1000=0.00352, 2500=0.00297 (USD)", RoHS="RoHS Compliant", Size / Dimension="0.063\" L x 0.031\" W (1.60mm x 0.80mm)", Stock 1=1261582, Supplier 1=Digi-Key, Supplier Device Package=0603
R3 R4 R13: library part "RES 1K OHM 1% 1/10W 0603", "1.0K 0603", Manufacturer="Stackpole Electronics Inc.", Manufacturer Part Number=RMCF0603FT1K00, Operating Temperature="-55°C ~ 155°C", Package / Case=0603, Power (Watts)="0.1W, 1/10W", Resistance (Ohms)=1.0k, Supplier Part Number 1=RMCF0603FT1K00CT-ND, Temperature Coefficient=±100ppm/°C, Tolerance=±1%, Category=Resistors, ComponentLink1Description=https://www.seielect.com/Catalog/SEI-RMCF_RMCP.pdf, ComponentLink1URL=https://www.seielect.com/Catalog/SEI-RMCF_RMCP.pdf, Composition="Thick Film", Failure Rate=-, Features="Automotive AEC-Q200", Height - Seated (Max)="0.022\" (0.55mm)", Packaging="Cut Tape (CT)", Part Status=Active, Pricing 1="1=0.1, 10=0.02, 100=0.0081, 1000=0.00364, 2500=0.00316 (USD)", RoHS="RoHS Compliant", Size / Dimension="0.061\" L x 0.031\" W (1.55mm x 0.80mm)", Stock 1=411308, Supplier 1=Digi-Key, Supplier Device Package=0603
R12: library part "RES 4.7K OHM 1/10W 5% 0603 SMD", "4.7K 0603", Manufacturer="Panasonic Electronic Components", Manufacturer Part Number=ERJ-3GEYJ472V, Package / Case=0603, Power (Watts)="0.1W, 1/10W", Resistance (Ohms)=27k, Supplier Part Number 1=P4.7KGCT-ND, Temperature Coefficient=±200ppm/°C, Tolerance=±5%, Category=Resistors, ComponentLink1Description=http://industrial.panasonic.com/www-cgi/jvcr13pz.cgi?E+PZ+3+AOA0001+ERJ3GEYJ472V+7+WW, ComponentLink1URL=http://industrial.panasonic.com/www-cgi/jvcr13pz.cgi?E+PZ+3+AOA0001+ERJ3GEYJ472V+7+WW, Composition="Thick Film", Features="Automotive AEC-Q200 Qualified", Height="0.022\" (0.55mm)", Number of Terminations=2, Packaging="Cut Tape (CT)", Pricing 1="1=0.1, 50=0.0126, 100=0.0096, 250=0.00716, 500=0.00528, 1000=0.00352, 2500=0.00297 (USD)", RoHS="RoHS Compliant", Size / Dimension="0.063\" L x 0.031\" W (1.60mm x 0.80mm)", Stock 1=1261582, Supplier 1=Digi-Key, Supplier Device Package=0603
R14 R16 R27 R28: library part "RES 4.7K OHM 1/10W 5% 0603 SMD", "4.7K 0603", Manufacturer="Panasonic Electronic Components", Manufacturer Part Number=ERJ-3GEYJ472V, Package / Case=0603, Power (Watts)="0.1W, 1/10W", Resistance (Ohms)=10K, Supplier Part Number 1=P4.7KGCT-ND, Temperature Coefficient=±200ppm/°C, Tolerance=±5%, Category=Resistors, ComponentLink1Description=http://industrial.panasonic.com/www-cgi/jvcr13pz.cgi?E+PZ+3+AOA0001+ERJ3GEYJ472V+7+WW, ComponentLink1URL=http://industrial.panasonic.com/www-cgi/jvcr13pz.cgi?E+PZ+3+AOA0001+ERJ3GEYJ472V+7+WW, Composition="Thick Film", Features="Automotive AEC-Q200 Qualified", Height="0.022\" (0.55mm)", Number of Terminations=2, Packaging="Cut Tape (CT)", Pricing 1="1=0.1, 50=0.0126, 100=0.0096, 250=0.00716, 500=0.00528, 1000=0.00352, 2500=0.00297 (USD)", RoHS="RoHS Compliant", Size / Dimension="0.063\" L x 0.031\" W (1.60mm x 0.80mm)", Stock 1=1261582, Supplier 1=Digi-Key, Supplier Device Package=0603
R17: library part "RES 4.7K OHM 1/10W 5% 0603 SMD", "4.7K 0603", Manufacturer="Panasonic Electronic Components", Manufacturer Part Number=ERJ-3GEYJ472V, Package / Case=0603, Power (Watts)="0.1W, 1/10W", Resistance (Ohms)=100k, Supplier Part Number 1=P4.7KGCT-ND, Temperature Coefficient=±200ppm/°C, Tolerance=±5%, Category=Resistors, ComponentLink1Description=http://industrial.panasonic.com/www-cgi/jvcr13pz.cgi?E+PZ+3+AOA0001+ERJ3GEYJ472V+7+WW, ComponentLink1URL=http://industrial.panasonic.com/www-cgi/jvcr13pz.cgi?E+PZ+3+AOA0001+ERJ3GEYJ472V+7+WW, Composition="Thick Film", Features="Automotive AEC-Q200 Qualified", Height="0.022\" (0.55mm)", Number of Terminations=2, Packaging="Cut Tape (CT)", Pricing 1="1=0.1, 50=0.0126, 100=0.0096, 250=0.00716, 500=0.00528, 1000=0.00352, 2500=0.00297 (USD)", RoHS="RoHS Compliant", Size / Dimension="0.063\" L x 0.031\" W (1.60mm x 0.80mm)", Stock 1=1261582, Supplier 1=Digi-Key, Supplier Device Package=0603